# Altium PCB Controlador de velocidad.PcbDoc (part 1 of 2)
Units mil, origin at the board's own origin, x right, y up, seen from the top; angles counter-clockwise.
Board outline 3345 x 2660 mil, 2 copper layers (Top Layer, Bottom Layer); 54 components, 93 nets, 258 pads, 44 vias.
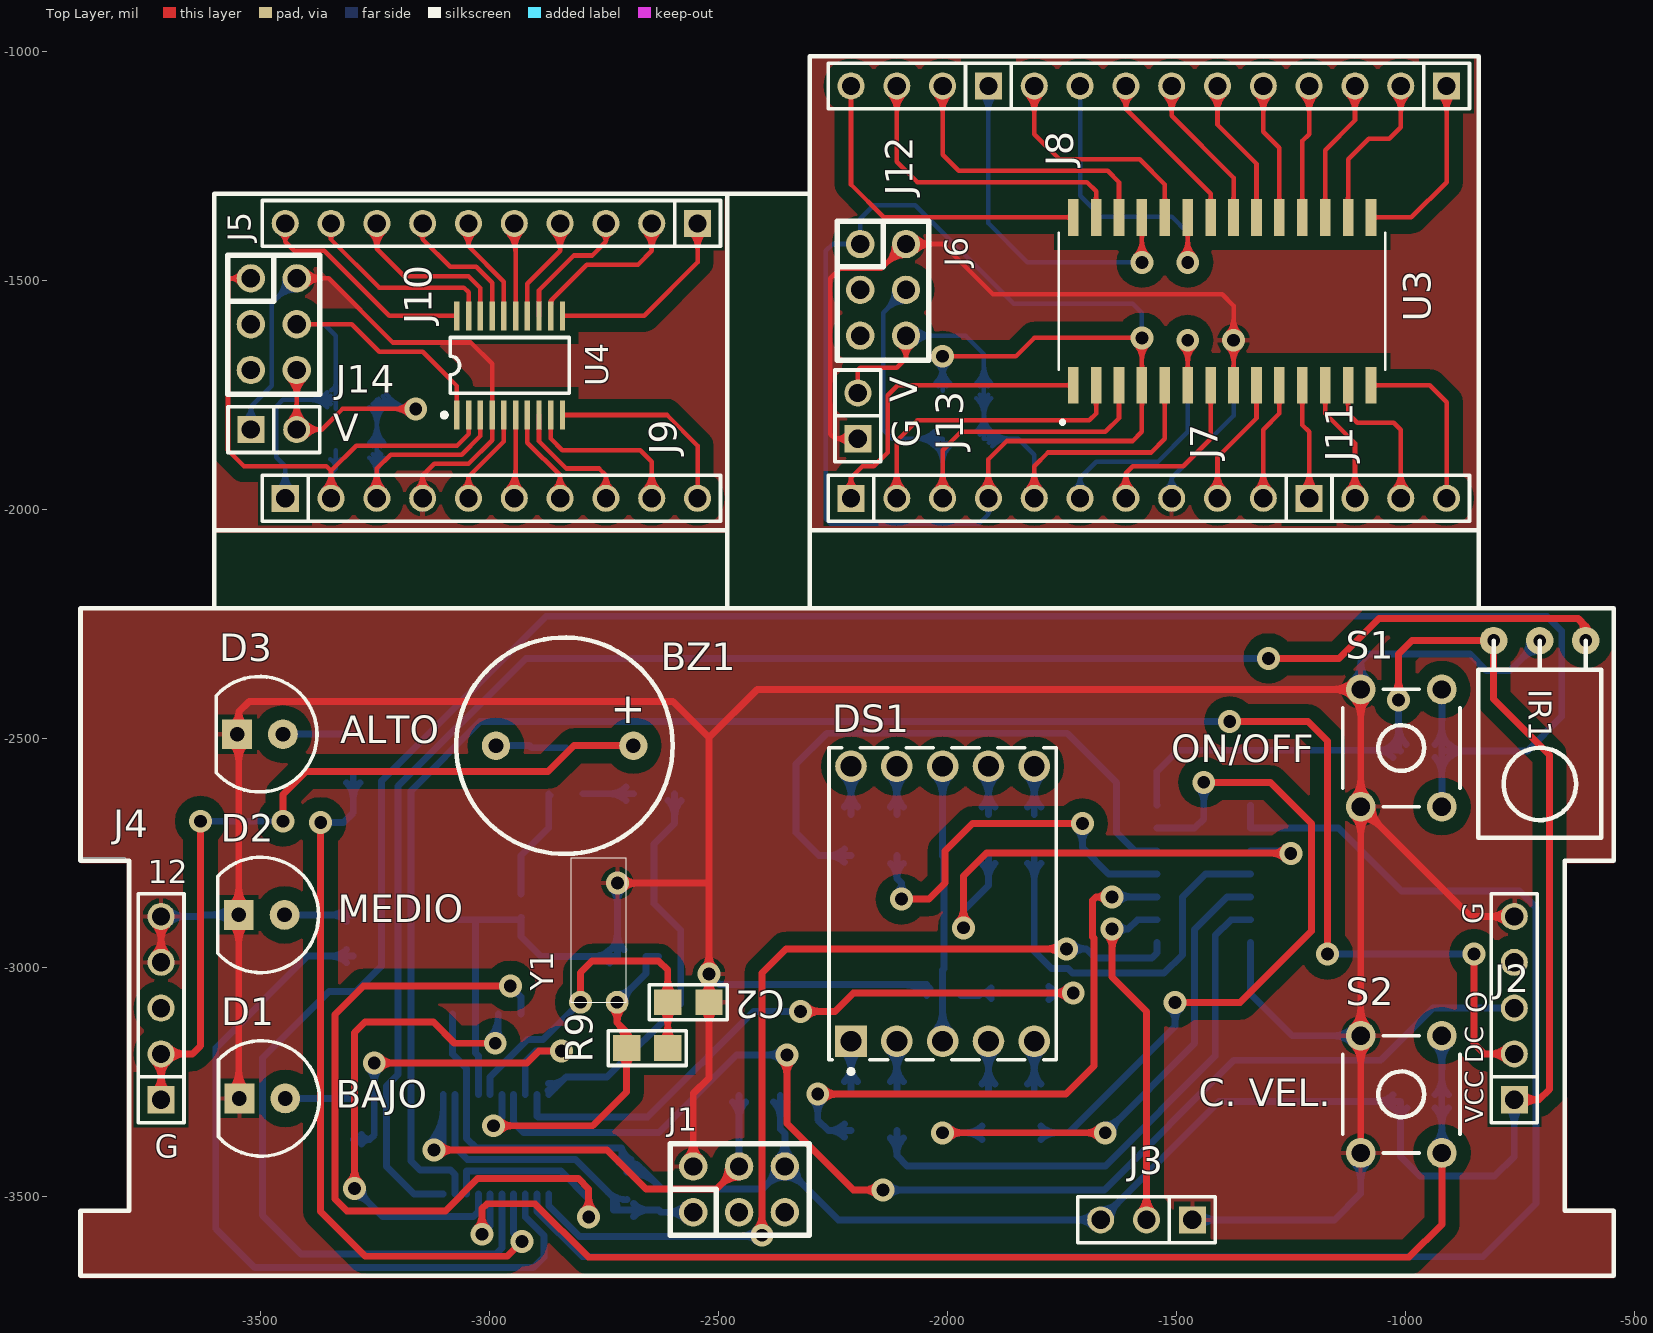
[diagram p0: Top Layer view]
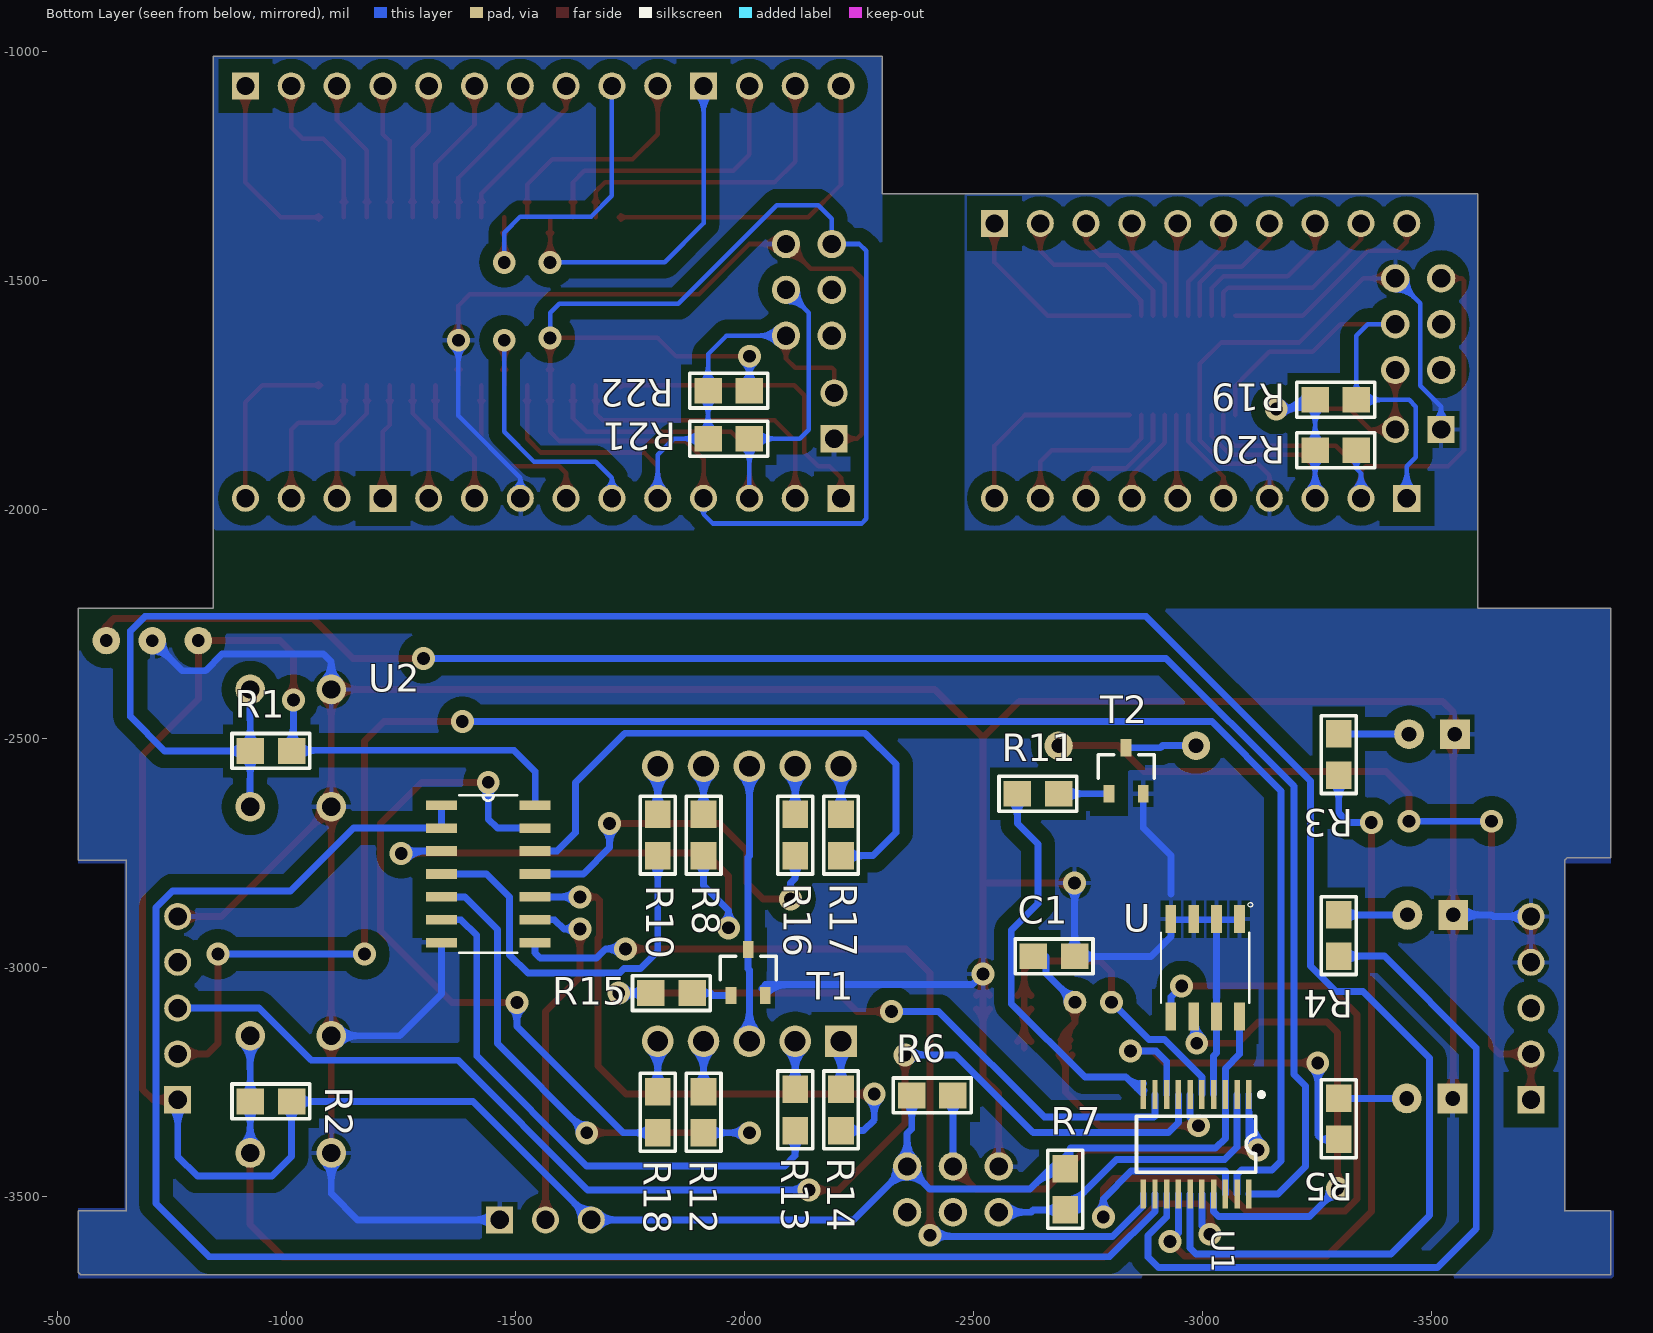
[diagram p1: Bottom Layer view, seen from below]

## Layer stack, top to bottom
Top Solder: solder mask 0.4, Solder Resist, Dk 3.5
Top Layer: signal copper 1.4
Dielectric1: dielectric 12.6, FR-4, Dk 4.8
Bottom Layer: signal copper 1.4
Bottom Solder: solder mask 0.4, Solder Resist, Dk 3.5

## Board outline
-3890,-2215 -3600,-2215 -3600,-1310 -2300,-1310 -2300,-1010 -840,-1010 -840,-2215 -545,-2215 -545,-2765 -650,-2765 -650,-3530 -545,-3530 -545,-3665 -550,-3670 -3890,-3670 -3890,-3530 -3790,-3530 -3790,-2765 -3795,-2760 -3890,-2760 -3890,-2215

## Design rules (kind name [scope] priority, off if disabled: settings)
Clearance GND [InPolygon] p1: gap=30
Clearance Clearance_1 [All] p2: gap=10
FabricationTestpoint [(IsPad And (OnTopLayer Or OnBottomLayer))] p1: side=3 testpointundercomponent=TRUE minsize=40 maxsize=100 preferedsize=60 minholesize=0 maxholesize=40 preferedholesize=32 testpointgrid=1 allowsidetop=TRUE allowsidebottom=TRUE usegrid=TRUE gridtolerance=0.01
PolygonConnect [All] p1: connectstyle=Relief reliefconductorwidth=10 reliefentries=4 polygonreliefangle="90 Angle" airgapwidth=10
RoutingVias [All] p1: holewidth=28 width=50 viastyle="Through Hole" minholewidth=28 minwidth=50 maxholewidth=28 maxwidth=50
SolderMaskExpansion [All] p1: expansion=4
Width Placas_prueba [InNet('A4-2', 'A4-3', 'A5-2', 'A5-3', 'VCC-2', 'GND-2', 'VCC-3', 'GND-3', 'SH4-1', 'SH4-2', 'SH4-3', 'SH4-4', 'SH4-5', 'SH4-6', 'SH4-7', 'SH4-8', 'SH4-9', 'SH4-10', 'SH4-11', 'SH4-12', 'SH4-13', 'SH4-14', 'SH4-15', 'SH4-16', 'SH4-17', 'SH4-18', 'SH4-19', 'SH4-20', 'SH16-1', 'SH16-2', 'SH16-3', 'SH16-4', 'SH16-5', 'SH16-6', 'SH16-7', 'SH16-8', 'SH16-9', 'SH16-10', 'SH16-11', 'SH16-12', 'SH16-13', 'SH16-14', 'SH16-15', 'SH16-16', 'SH16-17', 'SH16-18', 'SH16-19', 'SH16-20', 'SH16-21', 'SH16-22', 'SH16-23', 'SH16-24', 'SH16-25', 'SH16-26', 'SH16-27', 'SH16-28')] p1: maxlimit=10 minlimit=10 preferedwidth=10
Width [All] p2: maxlimit=20 minlimit=15 preferedwidth=15 bottomlayer_maxwidth=15 minimp=50.000000 maximp=50.000000 favimp=50.000000
29 further rules are at their usual default settings.

## Components (designator, comment, footprint, x,y, rotation, side; value= is the part's Value field where it differs from the comment)
BZ1 "BUZZER CON OSCILADOR" "BUZZER 12MM" -2835,-2515 r180 top
C1 "22p" 0805 -2675,-2975 r180 bottom
C2 "22p" 0805 -2565,-3075 r0 top
D1 "ROJO" LED5 -3495,-3285 r180 top
D2 "AMARILLO" LED5 -3496.52,-2884.37 r180 top
D3 "VERDE" LED5 -3500,-2490 r180 top
DS1 "HDSP-5503" H-10 -2010,-2860 r0 top
IR1 "IRM8601S" IRM8601S -572.99,-2348.9 r180 top
J1 "BDM Port" JBDM -2554.37,-3533.48 r0 top
J2 "CON5" SIP5 -762.17,-3287.82 r90 top
J3 "JUMPER" JUMPER3 -1565,-3550 r180 top
J4 "CON5" SIP5 -3716,-3287.82 r90 top
J5 "BDM Port" JBDM -3520,-1495 r270 top (schematic designator J1)
J6 "BDM Port" JBDM -2190,-1420 r270 top (schematic designator J1)
J7 "CON10" SIP10 -2210,-1975 r0 top
J8 "CON10" SIP10 -910,-1075 r180 top
J9 "CON10" SIP10 -3445,-1975 r0 top
J10 "CON10" SIP10 -2545,-1375 r180 top
J11 "CON4" SIP4 -1060,-1975 r0 top
J12 "CON4" SIP4 -2060,-1075 r180 top
J13 "CON2" SIP2 -2195,-1795 r90 top
J14 "CON2" SIP2 -3470,-1825 r0 top
R1 "10k" 0805 -965.63,-2526.52 r180 bottom
R2 "10k" 0805 -965.63,-3291.52 r180 bottom
R3 "330" 0805 -3296.52,-2534.37 r270 bottom
R4 "330" 0805 -3296.52,-2929.37 r270 bottom
R5 "330" 0805 -3296.52,-3329.37 r270 bottom
R6 "4K7" 0805 -2409.37,-3278.48 r180 bottom
R7 "4K7" 0805 -2699.37,-3483.48 r270 bottom
R8 "330" 0805 -1910,-2710 r90 bottom
R9 "3M" 0805 -2655,-3175 r180 top (schematic designator R5)
R10 "330" 0805 -1810,-2710 r90 bottom
R11 "10K" 0805 -2640,-2620 r180 bottom
R12 "330" 0805 -1910,-3315 r90 bottom
R13 "330" 0805 -2110,-3310 r90 bottom
R14 "330" 0805 -2210,-3310 r90 bottom
R15 "10k" 0805 -1840,-3055 r180 bottom
R16 "330" 0805 -2110,-2710 r90 bottom
R17 "330" 0805 -2210,-2710 r90 bottom
R18 "330" 0805 -1810,-3315 r90 bottom
R19 "4K7" 0805 -3290,-1760 r180 bottom
R20 "4K7" 0805 -3290,-1870 r180 bottom
R21 "4K7" 0805 -1965,-1845 r180 bottom
R22 "4K7" 0805 -1965,-1740 r180 bottom
S1 "ON/OFF" TACTSWITCH -1008.9,-2520.15 r0 top
S2 "CV" TACTSWITCH -1008.9,-3276.05 r0 top
T1 "TRANSISTOR NPN" SOT23 -1970,-3060 r180 bottom
T2 "TRANSISTOR NPN" SOT23 -2795,-2620 r180 bottom
U "AT24C256C-SSHL-T" SOIC127P600X175-8N -3005,-3000 r270 bottom
U1 "MC9S08SH4 (TSSOP20)" TSSOP20 -2985,-3385 r0 bottom
U2 "74HC164D,653" SOIC127P600X175-14N -1440,-2795 r180 bottom (schematic designator U1)
U3 "SH16" *SOIC127P1032X265-28N -1400,-1545 r90 top (schematic designator U1)
U4 "MC9S08SH4 (TSSOP20)" TSSOP20 -2955,-1685 r0 top
Y1 "32.768 KHz" X32768 -2720,-3075 r180 top

## Footprints (in the part's own frame and the unit in brackets; to place one, negate y for a bottom-side part, rotate by r counter-clockwise, add the part's x,y. Pads: shape width x height; smd on the part's side, far side on the other; paste and mask are expansions set on the pad)
0805 [mil] "Pasivo 0805"
  rect 60x56 smd: 1(-45,0) 2(45,0)
  silkscreen extent -85,-38 85,38, body extent -40,-25 39,25, height 15
*SOIC127P1032X265-28N [mm]
  rect 2.05x0.59 smd: 1(-4.655,8.255) 2(-4.655,6.985) 3(-4.655,5.715) 4(-4.655,4.445) 5(-4.655,3.175) 6(-4.655,1.905) 7(-4.655,0.635) 8(-4.655,-0.635) 9(-4.655,-1.905) 10(-4.655,-3.175) 11(-4.655,-4.445) 12(-4.655,-5.715) 13(-4.655,-6.985) 14(-4.655,-8.255) 15(4.655,-8.255) 16(4.655,-6.985) 17(4.655,-5.715) 18(4.655,-4.445) 19(4.655,-3.175) 20(4.655,-1.905) 21(4.655,-0.635) 22(4.655,0.635) 23(4.655,1.905) 24(4.655,3.175) 25(4.655,4.445) 26(4.655,5.715) 27(4.655,6.985) 28(4.655,8.255)
  silkscreen extent -6.8,-9.05 3.8,9.05
"BUZZER 12MM" [mil]
  round 62 hole 32: 1(-150,0) 2(150,0)
  silkscreen extent -236,-236 236,236, body extent -368,-236 240,236, height 380
H-10 [mil] "LED, 7-Segment Display, 14.22 mm, RHD; 10 Leads; Row Space 15.24 mm; Pitch 2.54 mm"
  rect 69x69 hole 45.5: 1(-200,-300)
  round 69 hole 45.5: 2(-100,-300) 3(0,-300) 4(100,-300) 5(200,-300) 6(200,300) 7(100,300) 8(0,300) 9(-100,300) 10(-200,300)
  silkscreen extent -248,-371 248,341
IRM8601S [mm]
  round 1.524 hole 0.7: 1(0.85,-1.61) 2(3.4,-1.6) 3(5.95,-1.61)
  silkscreen extent -0.01,-1.61 6.8,9.33
JBDM [mil]
  round 62 hole 40: 1(0,0) 2(0,100) 3(100,0) 4(100,100) 5(200,0) 6(200,100)
  silkscreen extent -50,-50 253,150
JUMPER3 [mm]
  rect 1.5x1.5 hole 1.016: 1(-2.54,0)
  round 1.5 hole 1.016: 2(0,0) 3(2.54,0)
  silkscreen extent -3.81,-1.27 3.81,1.27, body extent -3.81,-1.3 3.81,1.27, height 16.15
LED5 [mil]
  round 65 hole 32: 1(-50,0)
  rect 65x65 hole 32: 2(50,0)
  silkscreen extent -124,-126 96,126, body extent -117,-117 97,120, height 485
SIP2 [mm]
  rect 1.5x1.5 hole 1.016: 1(-1.27,0)
  round 1.5 hole 1.016: 2(1.27,0)
  silkscreen extent -2.54,-1.27 2.54,1.27
SIP4 [mil]
  rect 59.06x59.06 hole 40: 1(-150,0)
  round 59.06 hole 40: 2(-50,0) 3(50,0) 4(150,0)
  silkscreen extent -200,-50 200,50, body extent -200,-50 200,50, height 330
SIP5 [mm]
  rect 1.5x1.5 hole 1.016: 1(0,0)
  round 1.5 hole 1.016: 2(2.54,0) 3(5.08,0) 4(7.62,0) 5(10.16,0)
  silkscreen extent -1.27,-1.27 11.43,1.27, body extent -1.27,-1.27 11.43,1.27, height 8.38
SIP10 [mm]
  rect 1.5x1.5 hole 1.016: 1(0,0)
  round 1.5 hole 1.016: 2(2.54,0) 3(5.08,0) 4(7.62,0) 5(10.16,0) 6(12.7,0) 7(15.24,0) 8(17.78,0) 9(20.32,0) 10(22.86,0)
  silkscreen extent -1.27,-1.27 24.13,1.27, body extent -1.27,-1.3 24.13,1.27, height 8.38
SOIC127P600X175-8N [mm]
  rect 1.55x0.6 smd: 1(-2.7,1.905) 2(-2.7,0.635) 3(-2.7,-0.635) 4(-2.7,-1.905) 5(2.7,-1.905) 6(2.7,-0.635) 7(2.7,0.635) 8(2.7,1.905)
  silkscreen extent -3.63,-2.45 1.95,2.63
SOIC127P600X175-14N [mil]
  rect 67x21 smd: 1(-102,150) 2(-102,100) 3(-102,50) 4(-102,0) 5(-102,-50) 6(-102,-100) 7(-102,-150) 8(102,-150) 9(102,-100) 10(102,-50) 11(102,0) 12(102,50) 13(102,100) 14(102,150)
  silkscreen extent -63,-172 63,172
SOT23 [mm]
  rect 0.6x0.95 smd: 1(0,0) 2(0.95,2.55) 3(1.9,0)
  silkscreen extent -0.6,0.87 2.5,2.18, body extent -0.53,-0.25 2.47,2.88, height 1
TACTSWITCH [mil]
  round 65 hole 40: 1(-88.58,-127.95) 1(-88.58,127.95) 2(88.58,-127.95) 2(88.58,127.95)
  silkscreen extent -128,-128 128,128, body extent -120,-156 124,156, height 276
TSSOP20 [mm]
  rect 0.3x1.6 smd: 1(-2.925,-2.75) 2(-2.275,-2.75) 3(-1.625,-2.75) 4(-0.975,-2.75) 5(-0.325,-2.75) 6(0.325,-2.75) 7(0.975,-2.75) 8(1.625,-2.75) 9(2.275,-2.75) 10(2.925,-2.75) 11(2.925,2.75) 12(2.275,2.75) 13(1.625,2.75) 14(0.975,2.75) 15(0.325,2.75) 16(-0.325,2.75) 17(-0.975,2.75) 18(-1.625,2.75) 19(-2.275,2.75) 20(-2.925,2.75)
  silkscreen extent -3.75,-2.87 3.3,1.55
X32768 [mil]
  round 50 hole 28: 1(80.5,0) 2(0.5,0)
  silkscreen extent -19,-315 101,0

## Part data
BZ1: library part BUZZER
C1 C2: library part CAP
D1 D2 D3: library part LED
DS1: "14.22 mm Gray Surface HER 7-Segment Display: CC, RH DP"
IR1: "Sensor IR"
J1 J5 J6: library part JBDM
J3: library part JUMPER3
R1 R2 R3 R4 R5 R6 R7 R8 R9 R10 R11 R12 R13 R14 R15 R16 R17 R18 R19 R20 R21 R22: library part RES
S1 S2: library part "TACT SWITCH"
U: "EEPROM Memory IC 256Kb _32K x 8_ I²C 1MHz 550ns 8-SOIC"
U1 U4: library part MC9S08SH8_20
U2: "Shift Shift Register 1 Element 8 Bit 14-SO"
U3: library part MAX3243EWIT, "3/5 Transceiver Full RS232 28-SOIC"
Y1: library part CRYSTAL

## Via types
v1: diameter 50, hole 28, Top Layer to Bottom Layer, 44 vias

## Nets (pads, with @x,y where several pads share a name; then routed paths per layer and width w, separated by ;. In a path a pad name is that pad's centre, name@x,y a point inside that pad or via, vN(x,y) a via of type N, cw(c..) or ccw(c..) an arc to the next point about the centre after c; other vN are vias at no path point)
12V: BZ1.1 J4.1 J4.2 | length 1983.7
  Top Layer w15: J4.1@-3731.58,-3272.25 ccw(c-3769.18,-3234.64) -3716,-3234.64 ccw(c-3662.82,-3234.64) J4.1@-3700.43,-3272.25 ; J4.2@-3731.58,-3203.4 cw(c-3769.18,-3241) -3716,-3241 cw(c-3662.82,-3241) -3700.43,-3203.4 cw(c-3662.82,-3241) -3662.82,-3187.82 cw(c-3662.82,-3134.64) J4.2@-3700.43,-3172.25 ; J4.1@-3716,-3287.82 J4.2@-3716,-3187.82 -3647.82,-3187.82 -3630,-3170 -3630,-2685 v1@-3625,-2680 ; v1(-3450,-2680) -3450,-2621.52 -3400,-2571.52 -2871.52,-2571.52 -2815,-2515 BZ1.1@-2685,-2515
  Bottom Layer w15: v1(-3630,-2680) v1(-3450,-2680)
A4: J1.1 R7.2 U1.2 | length 954.2
  Bottom Layer w15: U1.2@-3074.57,-3276.73 -3074.57,-3391.52 -3047.57,-3418.52 -2811.63,-3418.52 -2728.63,-3501.52 -2728.63,-3528.48 R7.2@-2699.36,-3528.48 -2629.63,-3528.48 -2624.63,-3533.48 J1.1@-2554.36,-3533.48 ; -2741.73,-3488.43 ccw(c-2699.36,-3446.07) R7.2@-2699.36,-3505.98 ; -2731.31,-3498.85 cw(c-2758.94,-3526.48) R7.2@-2719.86,-3526.48 ; R7.2@-2684.87,-3542.97 cw(c-2649.87,-3577.97) -2649.87,-3528.48 cw(c-2649.87,-3478.99) R7.2@-2684.87,-3513.98 ; J1.1@-2570.98,-3550.09 ccw(c-2611.1,-3590.21) -2611.1,-3533.48 ccw(c-2611.1,-3476.74) J1.1@-2570.98,-3516.86
A4-2: J5.1 J9.2 R20.2 U4.2 | length 1592.9
  Top Layer w10: J5.1@-3542.53,-1507.98 ccw(c-3565,-1520.94) -3565,-1495 ; J5.1@-3542.53,-1482.02 cw(c-3565,-1469.06) -3565,-1495 ; J5.1@-3520,-1495 -3565,-1495 ; J9.2@-3362.34,-1957.66 ccw(c-3404.22,-1915.78) -3345,-1915.78 ccw(c-3285.79,-1915.78) J9.2@-3327.66,-1957.66 ; J9.2@-3355.27,-1964.73 ccw(c-3380.07,-1939.93) -3345,-1939.93 ccw(c-3309.93,-1939.93) J9.2@-3334.73,-1964.73 ; J9.2@-3345,-1975 -3345,-1915 ; U4.2@-3044.57,-1793.27 -3044.57,-1834.57 -3070,-1860 -3290,-1860 -3345,-1915 ; -3565,-1495 -3570,-1500 -3570,-1870 -3535,-1905 -3355,-1905 -3345,-1915
  Bottom Layer w10: J9.2@-3361.39,-1956.75 ccw(c-3394.39,-1920) -3345,-1920 ; J9.2@-3354.71,-1964.19 ccw(c-3374.26,-1942.43) -3345,-1942.43 ccw(c-3315.74,-1942.43) J9.2@-3335.29,-1964.19 ; R20.2@-3346.57,-1889.88 cw(c-3358.28,-1910) -3335,-1910 cw(c-3311.72,-1910) R20.2@-3323.43,-1889.88 ; J9.2@-3345,-1975 -3345,-1920 ; R20.2@-3335,-1870 -3335,-1910 -3345,-1920 ; J9.2@-3328.61,-1956.75 cw(c-3295.61,-1920) -3345,-1920
A4-3: J6.1 J7.4 R22.2 U3.4 | length 3597.4
  Top Layer w10: v1(-2010,-1665) -1850,-1665 -1810,-1625 v1(-1575,-1625) U3.4@-1575,-1728.27 -1575,-1830 -1595,-1850 -1870,-1850 -1910,-1890 J7.4@-1910,-1975 ; J7.4@-1927.34,-1957.66 ccw(c-1969.22,-1915.78) -1910,-1915.78 ccw(c-1850.79,-1915.78) J7.4@-1892.66,-1957.66 ; J7.4@-1920.27,-1964.73 ccw(c-1945.07,-1939.93) -1910,-1939.93 ccw(c-1874.93,-1939.93) J7.4@-1899.73,-1964.73 ; v1@-1589.14,-1639.14 cw(c-1623.29,-1673.28) -1575,-1673.28 cw(c-1526.72,-1673.28) v1@-1560.86,-1639.14 ; U3.4@-1579.68,-1761.68 cw(c-1590.97,-1772.98) -1575,-1772.98 cw(c-1559.03,-1772.98) U3.4@-1570.32,-1761.68 ; U3.4@-1579.68,-1694.85 ccw(c-1590.97,-1683.56) -1575,-1683.56 ccw(c-1559.03,-1683.56) U3.4@-1570.32,-1694.85
  Bottom Layer w10: R22.2@-2026.26,-1723.74 ccw(c-2065.53,-1684.47) -2010,-1684.47 ccw(c-1954.47,-1684.47) R22.2@-1993.74,-1723.74 ; v1@-2024.14,-1679.14 cw(c-2058.29,-1713.28) -2010,-1713.28 cw(c-1961.72,-1713.28) v1@-1995.86,-1679.14 ; R22.2@-2019.19,-1730.81 ccw(c-2041.39,-1708.61) -2010,-1708.61 ccw(c-1978.62,-1708.61) R22.2@-2000.81,-1730.81 ; R22.2@-2010,-1740 v1(-2010,-1665) ; J7.4@-1918.37,-1998.05 cw(c-1922.71,-2010) -1910,-2010 ; J7.4@-1910,-1975 -1910,-2010 ; J7.4@-1901.63,-1998.05 ccw(c-1897.29,-2010) -1910,-2010 ; v1(-1575,-1625) -1575,-1570 -1595,-1550 -1855,-1550 -2070,-1335 -2160,-1335 -2190,-1365 J6.1@-2190,-1420 -2250,-1420 -2265,-1435 -2265,-2020 -2255,-2030 -1930,-2030 -1910,-2010
A5: J1.4 R6.2 U1.1 | length 1413.7
  Top Layer w15: v1(-3120.16,-3397.52) -2742.48,-3397.52 -2657.48,-3482.52 -2503.41,-3482.52 J1.4@-2454.36,-3433.48 ; v1@-3107.78,-3409.9 cw(c-3077.91,-3439.77) -3077.91,-3397.52 cw(c-3077.91,-3355.27) v1@-3107.78,-3385.15 ; J1.4@-2477.86,-3433.48 cw(c-2534.6,-3433.48) -2494.48,-3473.59 cw(c-2454.36,-3513.71) J1.4@-2454.36,-3456.98
  Bottom Layer w15: v1@-3132.53,-3385.15 ccw(c-3210.69,-3306.99) U1.1@-3100.16,-3306.99 ; v1@-3121.93,-3395.76 ccw(c-3174.48,-3343.2) -3100.16,-3343.2 ; v1(-3120.16,-3397.52) -3100.16,-3377.52 U1.1@-3100.16,-3276.73 ; v1@-3111.32,-3406.36 ccw(c-3138.27,-3379.42) -3100.16,-3379.42 ; R6.2@-2468.86,-3292.97 cw(c-2503.86,-3327.97) -2454.36,-3327.97 cw(c-2404.87,-3327.97) R6.2@-2439.87,-3292.97 ; J1.4@-2454.36,-3433.48 R6.2@-2454.36,-3278.48
A5-2: J5.4 J9.1 R19.2 U4.1 | length 1388.8
  Top Layer w10: J5.4@-3420,-1595 -3300,-1595 -3240,-1655 -3145,-1655 -3100,-1700 -3070.16,-1729.84 U4.1@-3070.16,-1793.27
  Bottom Layer w10: J9.1@-3462.34,-1957.66 ccw(c-3504.22,-1915.78) -3445,-1915.78 ccw(c-3385.79,-1915.78) J9.1@-3427.66,-1957.66 ; J9.1@-3455.27,-1964.73 ccw(c-3480.07,-1939.93) -3445,-1939.93 ccw(c-3409.93,-1939.93) J9.1@-3434.73,-1964.73 ; J9.1@-3445,-1975 -3445,-1905 -3465,-1885 -3465,-1775 -3450,-1760 R19.2@-3335,-1760 ; J5.4@-3420,-1595 -3360,-1595 -3335,-1620 -3335,-1725 ; R19.2@-3353.26,-1776.26 ccw(c-3392.53,-1815.53) -3392.53,-1760 ccw(c-3392.53,-1704.47) R19.2@-3353.26,-1743.74 ; R19.2@-3346.19,-1769.19 ccw(c-3368.39,-1791.38) -3368.39,-1760 ccw(c-3368.39,-1728.61) R19.2@-3346.19,-1750.81 ; R19.2@-3344.13,-1738.89 ccw(c-3350.13,-1725) -3335,-1725 ; R19.2@-3335,-1780 R19.2@-3335,-1760 ; R19.2@-3325.87,-1738.89 cw(c-3319.87,-1725) -3335,-1725 ; R19.2@-3335,-1760 -3335,-1725
A5-3: J6.4 J7.3 R21.2 U3.3 | length 1790.2
  Top Layer w10: J7.3@-2027.34,-1957.66 ccw(c-2069.22,-1915.78) -2010,-1915.78 ccw(c-1950.79,-1915.78) J7.3@-1992.66,-1957.66 ; J7.3@-2020.27,-1964.73 ccw(c-2045.07,-1939.93) -2010,-1939.93 ccw(c-1974.93,-1939.93) J7.3@-1999.73,-1964.73 ; J7.3@-2010,-1975 -2010,-1870 -1970,-1830 -1655,-1830 -1625,-1800 U3.3@-1625,-1728.27 ; U3.3@-1629.68,-1761.68 cw(c-1640.97,-1772.98) -1625,-1772.98 cw(c-1609.03,-1772.98) U3.3@-1620.32,-1761.68
  Bottom Layer w10: J6.4@-2116,-1520 cw(c-2178.77,-1520) -2134.39,-1564.38 cw(c-2090,-1608.77) J6.4@-2090,-1546 ; J6.4@-2106,-1520 cw(c-2144.63,-1520) -2117.31,-1547.31 cw(c-2090,-1574.63) J6.4@-2090,-1536 ; J6.4@-2090,-1520 -2140,-1570 -2140,-1825 -2120,-1845 R21.2@-2010,-1845 J7.3@-2010,-1975 ; R21.2@-2028.26,-1861.26 ccw(c-2067.53,-1900.53) -2067.53,-1845 ccw(c-2067.53,-1789.47) R21.2@-2028.26,-1828.74 ; R21.2@-2026.26,-1861.26 cw(c-2065.53,-1900.53) -2010,-1900.53 cw(c-1954.47,-1900.53) R21.2@-1993.74,-1861.26 ; R21.2@-2021.19,-1854.19 ccw(c-2043.39,-1876.38) -2043.39,-1845 ccw(c-2043.39,-1813.61) R21.2@-2021.19,-1835.81 ; R21.2@-2019.19,-1854.19 cw(c-2041.39,-1876.38) -2010,-1876.38 cw(c-1978.62,-1876.38) R21.2@-2000.81,-1854.19
B6: C1.1 R9.2 U1.6 Y1.2 | length 1176.6
  Top Layer w15: v1(-2990.63,-3344.52) -2773.63,-3344.52 -2700,-3270.89 R9.2@-2700,-3175 -2700,-3140 ; v1@-2978.26,-3356.9 cw(c-2948.39,-3386.77) -2948.39,-3344.52 cw(c-2948.39,-3302.27) v1@-2978.26,-3332.15 ; Y1.2@-2732.88,-3087.37 cw(c-2762.75,-3117.25) -2720.5,-3117.25 cw(c-2678.25,-3117.25) Y1.2@-2708.13,-3087.37 ; -2721.16,-3118.84 cw(c-2760.13,-3157.82) R9.2@-2707.28,-3173.44 ; Y1.2@-2720.5,-3075 -2720.5,-3119.5 -2700,-3140 ; R9.2@-2714.5,-3189.49 cw(c-2749.49,-3224.49) -2700,-3224.49 cw(c-2650.51,-3224.49) R9.2@-2685.51,-3189.49 ; R9.2@-2710.03,-3157.12 ccw(c-2719.63,-3140) -2700,-3140 ; -2703.32,-3136.68 cw(c-2732.59,-3165.96) R9.2@-2692.89,-3177.69 ; R9.2@-2689.97,-3157.12 cw(c-2680.37,-3140) -2700,-3140
  Bottom Layer w15: v1(-2990.63,-3344.52) -2972.2,-3326.09 U1.6@-2972.2,-3276.73 ; Y1.2@-2720.5,-3075 -2657.63,-3012.13 -2657.63,-2975 C1.1@-2630,-2975 ; Y1.2@-2720.5,-3057.5 ccw(c-2720.5,-3015.25) -2690.63,-3045.12 ccw(c-2660.75,-3075) Y1.2@-2703,-3075
B7: C2.1 R9.1 U1.5 Y1.1 | length 980.3
  Top Layer w15: Y1.1@-2800.5,-3075 -2800.5,-3010.5 -2775,-2985 -2630,-2985 -2610,-3005 C2.1@-2610,-3075 R9.1@-2610,-3175 ; R9.1@-2624.5,-3160.5 ccw(c-2659.49,-3125.51) -2610,-3125.51 ccw(c-2560.51,-3125.51) R9.1@-2595.51,-3160.5 ; C2.1@-2624.5,-3089.49 cw(c-2659.49,-3124.49) -2610,-3124.49 cw(c-2560.51,-3124.49) C2.1@-2595.51,-3089.49 ; C2.1@-2624.5,-3060.5 ccw(c-2659.49,-3025.51) -2610,-3025.51 ccw(c-2560.51,-3025.51) C2.1@-2595.51,-3060.5
  Bottom Layer w15: U1.5@-2997.8,-3276.73 -2997.8,-3238.52 -2915.8,-3156.52 -2882.02,-3156.52 Y1.1@-2800.5,-3075
BUZZER: R11.1 U1.10 | length 1009
  Bottom Layer w15: U1.10@-2871.09,-3267.69 ccw(c-2869.52,-3246.84) -2854.74,-3261.62 ; U1.10@-2869.96,-3252.73 ccw(c-2866.27,-3203.89) -2831.64,-3238.52 ; U1.10@-2869.84,-3276.73 -2831.63,-3238.52 ; R11.1@-2609.5,-2634.49 cw(c-2644.49,-2669.49) -2595,-2669.49 cw(c-2545.51,-2669.49) R11.1@-2580.51,-2634.49 ; R11.1@-2595,-2620 -2595,-2685 -2640,-2730 -2640,-2860 -2581.63,-2918.37 -2581.63,-3077.52 -2742.63,-3238.52 -2831.63,-3238.52
CLOCK: U1.11 U2.8 | length 2276.6
  Top Layer w15: v1@-2417.01,-3571.15 ccw(c-2446.88,-3541.27) -2404.63,-3541.27 ccw(c-2362.39,-3541.27) v1@-2392.26,-3571.15 ; v1(-2404.63,-3583.52) -2404.63,-3011.52 -2351.63,-2958.52 v1(-1739.63,-2958.52) ; v1@-1752.01,-2970.9 ccw(c-1781.88,-3000.77) -1781.88,-2958.52 ccw(c-1781.88,-2916.27) v1@-1752.01,-2946.15
  Bottom Layer w15: U1.11@-2869.84,-3493.27 -2869.84,-3518.52 -2802.34,-3586.02 -2407.13,-3586.02 v1(-2404.63,-3583.52) ; -2452.92,-3586.02 ccw(c-2452.92,-3535.24) v1@-2417.01,-3571.15 ; -2440.85,-3586.02 cw(c-2440.85,-3619.74) v1@-2417.01,-3595.9 ; v1(-1739.63,-2958.52) -1696.48,-2958.52 -1676.48,-2978.52 -1553.52,-2978.52 -1542,-2967 U2.8@-1542,-2945 ; v1@-1727.26,-2970.9 cw(c-1697.39,-3000.77) -1697.39,-2958.52 cw(c-1697.39,-2916.27) v1@-1727.26,-2946.15
CV: R2.1 S2.2 U1.16 | length 3141.2
  Top Layer w15: v1@-3028.01,-3569.15 ccw(c-3057.88,-3539.27) -3015.63,-3539.27 ccw(c-2973.39,-3539.27) v1@-3003.26,-3569.15 ; v1(-3015.63,-3581.52) -3015.63,-3525.63 -3005,-3515 -2900,-3515 -2783.48,-3631.52 -991.52,-3631.52 -920.32,-3560.32 S2.2@-920.32,-3404
  Bottom Layer w15: v1(-3015.63,-3581.52) -2997.8,-3563.69 U1.16@-2997.8,-3493.27 ; S2.2@-938,-3165.77 cw(c-980.67,-3208.45) -920.32,-3208.45 cw(c-859.96,-3208.45) S2.2@-902.64,-3165.77 ; S2.2@-936.88,-3385.27 ccw(c-969.37,-3348.53) -920.32,-3348.53 ; R2.1@-935.13,-3306.02 cw(c-970.13,-3341.01) -920.63,-3341.01 cw(c-871.14,-3341.01) R2.1@-906.14,-3306.02 ; R2.1@-935.13,-3277.03 ccw(c-970.13,-3242.03) -920.63,-3242.03 ccw(c-871.14,-3242.03) R2.1@-906.14,-3277.03 ; S2.2@-920.32,-3404 -920.32,-3348.52 ; S2.2@-920.32,-3148.1 -920.32,-3220.21 -920.63,-3220.52 R2.1@-920.63,-3291.52 -920.63,-3348.21 -920.32,-3348.52 ; S2.2@-903.76,-3385.27 cw(c-871.26,-3348.53) -920.32,-3348.53
DATA: U1.12 U2.1 U2.2 | length 3699.4
  Bottom Layer w15: U1.12@-2895.43,-3493.27 -2895.43,-3531.52 -2796.43,-3630.52 -830.52,-3630.52 -714.63,-3514.63 -714.63,-2868.52 -750.63,-2832.52 -1008.11,-2832.52 -1145.63,-2695 U2.2@-1338,-2695 U2.1@-1338,-2645
DC0: J2.2 U1.19 | length 4199.8
  Top Layer w15: v1(-1383.48,-2462.52) -1212.48,-2462.52 -1170,-2505 v1(-1170,-2970) ; v1(-850,-2970) -850,-3165 -827.18,-3187.82 J2.2@-762.17,-3187.82 ; J2.2@-777.75,-3203.4 ccw(c-815.35,-3241) -815.35,-3187.82 ccw(c-815.35,-3134.64) J2.2@-777.75,-3172.25
  Bottom Layer w15: U1.19@-3074.57,-3493.27 -3074.57,-3451.52 -3084.57,-3441.52 -3150.63,-3441.52 -3170.63,-3421.52 -3170.63,-2613.52 -3019.63,-2462.52 v1(-1383.48,-2462.52) ; v1(-1170,-2970) v1(-850,-2970)
GND: C1.2 C2.2 D1.2 D2.2 D3.2 IR1.2 J1.2 J2.5 J3.1 J4.4 J4.5 S1.1 S2.1 T1.3 T2.3 U1.4 U2.7 U.1 U.2 U.3 U.4 U.7 | length 12060.2
  Top Layer w15: J4.4@-3731.58,-2972.25 ccw(c-3769.18,-2934.64) -3716,-2934.64 ccw(c-3662.82,-2934.64) J4.4@-3700.43,-2972.25 ; J4.5@-3731.58,-2903.4 cw(c-3769.18,-2941) -3716,-2941 cw(c-3662.82,-2941) J4.5@-3700.43,-2903.4 ; J4.4@-3716,-2987.82 J4.5@-3716,-2887.82 ; D1.2@-3564.2,-3266.69 ccw(c-3606.88,-3224.01) -3546.52,-3224.01 ccw(c-3486.17,-3224.01) D1.2@-3528.85,-3266.69 ; D2.2@-3564.2,-2902.04 cw(c-3606.88,-2944.72) -3546.52,-2944.72 cw(c-3486.17,-2944.72) D2.2@-3528.85,-2902.04 ; D2.2@-3564.2,-2866.69 ccw(c-3606.88,-2824.01) -3546.52,-2824.01 ccw(c-3486.17,-2824.01) D2.2@-3528.85,-2866.69 ; D3.2@-3564.2,-2507.04 cw(c-3606.88,-2549.72) -3546.52,-2549.72 cw(c-3486.17,-2549.72) D3.2@-3528.85,-2507.04 ; D3.2@-3560.8,-2468.84 ccw(c-3579.8,-2441.52) -3546.52,-2441.52 ; D1.2@-3546.52,-3284.37 D2.2@-3546.52,-2884.37 -3546.52,-2441.52 ; D3.2@-3532.25,-2468.84 cw(c-3513.25,-2441.52) -3546.52,-2441.52 ; v1(-2720,-2815) -2520,-2815 ; v1@-2707.63,-2827.37 cw(c-2677.75,-2857.25) -2677.75,-2815 cw(c-2677.75,-2772.75) v1@-2707.63,-2802.63 ; J1.2@-2570.98,-3416.86 ccw(c-2611.1,-3376.74) -2554.36,-3376.74 ccw(c-2497.63,-3376.74) J1.2@-2537.75,-3416.86 ; J1.2@-2554.36,-3433.48 -2554.36,-3274.36 -2520,-3240 C2.2@-2520,-3075 v1(-2520,-3013.36) -2520,-2497.52 ; C2.2@-2534.5,-3089.49 cw(c-2569.49,-3124.49) -2520,-3124.49 cw(c-2470.51,-3124.49) C2.2@-2505.51,-3089.49 ; C2.2@-2534.5,-3060.5 ccw(c-2569.49,-3025.51) -2520,-3025.51 ccw(c-2470.51,-3025.51) C2.2@-2505.51,-3060.5 ; v1@-2532.38,-3025.73 cw(c-2562.25,-3055.6) -2520,-3055.6 cw(c-2477.75,-3055.6) v1@-2507.63,-3025.73 ; v1@-2532.38,-3000.98 ccw(c-2562.25,-2971.11) -2520,-2971.11 ccw(c-2477.75,-2971.11) v1@-2507.63,-3000.98 ; S2.1@-1115.16,-3165.77 cw(c-1157.84,-3208.45) -1097.48,-3208.45 cw(c-1037.13,-3208.45) S2.1@-1079.81,-3165.77 ; S2.1@-1115.16,-3130.42 ccw(c-1157.84,-3087.74) -1097.48,-3087.74 ccw(c-1037.13,-3087.74) S2.1@-1079.81,-3130.42 ; S1.1@-1115.16,-2665.77 cw(c-1157.84,-2708.45) -1097.48,-2708.45 cw(c-1037.13,-2708.45) S1.1@-1079.81,-2665.77 ; S1.1@-1115.16,-2630.42 ccw(c-1157.84,-2587.74) -1097.48,-2587.74 ccw(c-1037.13,-2587.74) S1.1@-1079.81,-2630.42 ; S1.1@-1115.16,-2374.52 cw(c-1157.84,-2331.84) -1157.84,-2392.19 cw(c-1157.84,-2452.55) -1115.16,-2409.87 cw(c-1157.84,-2452.55) -1097.48,-2452.55 cw(c-1037.13,-2452.55) S1.1@-1079.81,-2409.87 ; S2.1@-1097.48,-3404 S2.1@-1097.48,-3148.1 S1.1@-1097.48,-2648.1 ; S1.1@-1097.48,-2673.1 cw(c-1097.48,-2733.45) -1054.81,-2690.77 cw(c-1012.13,-2648.1) S1.1@-1072.48,-2648.1 ; J2.5@-777.75,-2903.4 ccw(c-815.35,-2941) -815.35,-2887.82 ccw(c-815.35,-2834.64) J2.5@-777.75,-2872.25 ; J2.5@-762.17,-2887.82 -857.76,-2887.82 S1.1@-1097.48,-2648.1 ; -3546.52,-2441.52 -3523.52,-2418.52 -2599,-2418.52 -2520,-2497.52 ; -2520,-2497.52 -2414.67,-2392.19 S1.1@-1097.48,-2392.19 S1.1@-1097.48,-2648.1
  Bottom Layer w15: J4.5@-3716,-2887.82 -3633.63,-2887.82 -3630.18,-2884.37 D2.2@-3546.52,-2884.37 ; J4.5@-3700.43,-2903.4 cw(c-3662.82,-2941) -3662.82,-2887.82 cw(c-3662.82,-2834.64) J4.5@-3700.43,-2872.25 ; D2.2@-3564.2,-2902.04 ccw(c-3606.88,-2944.72) -3606.88,-2884.37 ccw(c-3606.88,-2824.01) D2.2@-3564.2,-2866.69 ; U.1@-3080,-2895 U.2@-3030,-2895 ; U1.4@-3023.39,-3276.73 -3023.39,-3192.52 -3030,-3185.91 U.2@-3030,-2895 ; -2930,-2839 -2930,-2755 -2869.8,-2694.8 T2.3@-2869.8,-2620 ; T2.3@-2869.8,-2626.52 T2.3@-2866.54,-2623.26 ; C1.2@-2736.5,-2989.49 ccw(c-2771.49,-3024.49) -2771.49,-2975 ccw(c-2771.49,-2925.51) C1.2@-2736.5,-2960.5 ; C1.2@-2734.5,-2960.5 ccw(c-2769.49,-2925.51) -2720,-2925.51 ccw(c-2670.51,-2925.51) C1.2@-2705.51,-2960.5 ; v1@-2732.37,-2827.37 cw(c-2762.25,-2857.25) -2720,-2857.25 ; -2720,-2857.25 cw(c-2677.75,-2857.25) v1@-2707.63,-2827.37 ; v1@-2720,-2825 C1.2@-2720,-2975 -2886.52,-2975 -2930,-2931.52 -2930,-2890 -2929,-2890 -2934,-2895 U.2@-3030,-2895 ; v1(-2520,-3013.36) -2496.83,-3036.52 -2044.8,-3036.52 T1.3@-2044.8,-3060 ; -2095.25,-3036.52 cw(c-2095.25,-3103.56) T1.3@-2047.85,-3056.16 ; -2059.04,-3036.52 cw(c-2059.04,-3067.35) T1.3@-2037.24,-3045.55 ; J3.1@-1465,-3550 -1155,-3550 -1097.48,-3492.48 S2.1@-1097.48,-3404 ; J3.1@-1449.43,-3565.58 cw(c-1411.82,-3603.18) -1411.82,-3550 cw(c-1411.82,-3496.82) J3.1@-1449.43,-3534.42 ; U2.7@-1338,-2945 -1338,-3057 -1246.9,-3148.1 S2.1@-1097.48,-3148.1 ; S2.1@-1115.16,-3421.68 cw(c-1157.84,-3464.36) -1097.48,-3464.36 cw(c-1037.13,-3464.36) S2.1@-1079.81,-3421.68 ; S2.1@-1115.16,-3165.77 ccw(c-1157.84,-3208.45) -1157.84,-3148.1 ccw(c-1157.84,-3087.74) S2.1@-1115.16,-3130.42 ; S1.1@-1115.03,-2374.38 ccw(c-1156.28,-2332.49) -1097.48,-2332.49 ; S1.1@-1097.48,-2392.19 -1097.48,-2332.48 ; S1.1@-1079.94,-2374.38 cw(c-1038.69,-2332.49) -1097.48,-2332.49 ; IR1.2@-729.34,-2285.91 cw(c-783.66,-2285.91) -745.25,-2324.32 cw(c-706.84,-2362.73) IR1.2@-706.84,-2308.41 ; IR1.2@-706.84,-2285.91 -772.46,-2351.52 -822.46,-2351.52 -858.99,-2315 -1080,-2315 -1097.48,-2332.48
NetBZ1_2: BZ1.2 T2.2 | length 154.5
  Bottom Layer w15: BZ1.2@-2985,-2515 -2911.63,-2515 -2907.03,-2519.61 T2.2@-2832.4,-2519.61
NetD1_1: D1.1 R5.1 | length 140
  Bottom Layer w15: D1.1@-3445,-3285 R5.1@-3305,-3285
NetD2_1: D2.1 R4.1 | length 227.7
  Bottom Layer w15: D2.1@-3446.52,-2884.37 R4.1@-3296.52,-2884.37 ; R4.1@-3311.02,-2898.86 ccw(c-3346.01,-2933.86) -3346.01,-2884.37 ccw(c-3346.01,-2834.87) R4.1@-3311.02,-2869.87
NetD3_1: D3.1 R3.1 | length 149.1
  Bottom Layer w15: D3.1@-3445.63,-2489.37 R3.1@-3296.52,-2489.37
NetDS1_1: DS1.1 R14.2 | length 285.1
  Bottom Layer w15: DS1.1@-2229.09,-3179.09 cw(c-2275.18,-3225.18) -2210,-3225.18 cw(c-2144.82,-3225.18) DS1.1@-2190.91,-3179.09 ; R14.2@-2224.5,-3248.5 ccw(c-2259.49,-3213.51) -2210,-3213.51 ccw(c-2160.51,-3213.51) R14.2@-2195.51,-3248.5 ; R14.2@-2210,-3265 DS1.1@-2210,-3160
NetDS1_2: DS1.2 R13.2 | length 285.1
  Bottom Layer w15: DS1.2@-2129.09,-3179.09 cw(c-2175.18,-3225.18) -2110,-3225.18 cw(c-2044.82,-3225.18) DS1.2@-2090.91,-3179.09 ; R13.2@-2124.5,-3248.5 ccw(c-2159.49,-3213.51) -2110,-3213.51 ccw(c-2060.51,-3213.51) R13.2@-2095.51,-3248.5 ; R13.2@-2110,-3265 DS1.2@-2110,-3160
NetDS1_3: DS1.3 DS1.8 T1.2 | length 806.9
  Bottom Layer w15: DS1.3@-2029.09,-3140.91 ccw(c-2075.18,-3094.82) -2010,-3094.82 ccw(c-1944.82,-3094.82) DS1.3@-1990.91,-3140.91 ; DS1.8@-2029.09,-2579.09 cw(c-2075.18,-2625.18) -2010,-2625.18 cw(c-1944.82,-2625.18) DS1.8@-1990.91,-2579.09 ; DS1.3@-2010,-3160 -2010,-3004.52 -2007.4,-3001.92 -2007.4,-2966.52 T1.2@-2007.4,-2959.61 -2007.4,-2758.49 -2010,-2755.89 DS1.8@-2010,-2560
NetDS1_4: DS1.4 R12.2 | length 290.1
  Bottom Layer w15: DS1.4@-1929.09,-3179.09 cw(c-1975.18,-3225.18) -1910,-3225.18 cw(c-1844.82,-3225.18) DS1.4@-1890.91,-3179.09 ; R12.2@-1924.5,-3253.5 ccw(c-1959.49,-3218.51) -1910,-3218.51 ccw(c-1860.51,-3218.51) R12.2@-1895.51,-3253.5 ; R12.2@-1910,-3270 DS1.4@-1910,-3160
NetDS1_5: DS1.5 R18.2 | length 290.1
  Bottom Layer w15: DS1.5@-1829.09,-3179.09 cw(c-1875.18,-3225.18) -1810,-3225.18 cw(c-1744.82,-3225.18) DS1.5@-1790.91,-3179.09 ; R18.2@-1824.5,-3253.5 ccw(c-1859.49,-3218.51) -1810,-3218.51 ccw(c-1760.51,-3218.51) R18.2@-1795.51,-3253.5 ; R18.2@-1810,-3270 DS1.5@-1810,-3160
NetDS1_6: DS1.6 R10.2 | length 285.1
  Bottom Layer w15: DS1.6@-1829.09,-2579.09 cw(c-1875.18,-2625.18) -1810,-2625.18 cw(c-1744.82,-2625.18) DS1.6@-1790.91,-2579.09 ; R10.2@-1824.5,-2648.5 ccw(c-1859.49,-2613.51) -1810,-2613.51 ccw(c-1760.51,-2613.51) R10.2@-1795.51,-2648.5 ; R10.2@-1810,-2665 DS1.6@-1810,-2560
NetDS1_7: DS1.7 R8.2 | length 285.1
  Bottom Layer w15: DS1.7@-1929.09,-2579.09 cw(c-1975.18,-2625.18) -1910,-2625.18 cw(c-1844.82,-2625.18) DS1.7@-1890.91,-2579.09 ; R8.2@-1924.5,-2648.5 ccw(c-1959.49,-2613.51) -1910,-2613.51 ccw(c-1860.51,-2613.51) R8.2@-1895.51,-2648.5 ; R8.2@-1910,-2665 DS1.7@-1910,-2560
NetDS1_9: DS1.9 R16.2 | length 285.1
  Bottom Layer w15: DS1.9@-2129.09,-2579.09 cw(c-2175.18,-2625.18) -2110,-2625.18 cw(c-2044.82,-2625.18) DS1.9@-2090.91,-2579.09 ; R16.2@-2124.5,-2648.5 ccw(c-2159.49,-2613.51) -2110,-2613.51 ccw(c-2060.51,-2613.51) R16.2@-2095.51,-2648.5 ; R16.2@-2110,-2665 DS1.9@-2110,-2560
NetDS1_10: DS1.10 R17.2 | length 285.1
  Bottom Layer w15: DS1.10@-2229.09,-2579.09 cw(c-2275.18,-2625.18) -2210,-2625.18 cw(c-2144.82,-2625.18) DS1.10@-2190.91,-2579.09 ; R17.2@-2224.5,-2648.5 ccw(c-2259.49,-2613.51) -2210,-2613.51 ccw(c-2160.51,-2613.51) R17.2@-2195.51,-2648.5 ; R17.2@-2210,-2665 DS1.10@-2210,-2560
NetJ3_2: J3.2 U2.9 | length 970.9
  Top Layer w15: v1@-1652.37,-2927.37 cw(c-1682.25,-2957.25) -1640,-2957.25 cw(c-1597.75,-2957.25) v1@-1627.63,-2927.37 ; v1(-1640,-2915) -1640,-3020 -1565,-3095 J3.2@-1565,-3550 ; J3.2@-1580.58,-3534.42 ccw(c-1618.18,-3496.82) -1565,-3496.82 ccw(c-1511.82,-3496.82) J3.2@-1549.43,-3534.42
  Bottom Layer w15: v1(-1640,-2915) -1605,-2915 ; v1@-1626,-2925.5 cw(c-1605,-2941.25) -1605,-2915 ; v1@-1626,-2904.5 ccw(c-1605,-2888.75) -1605,-2915 ; U2.9@-1542,-2895 -1585,-2895 -1605,-2915
NetR8_1: R8.1 U2.3 | length 1449.1
  Top Layer w15: v1@-1977.01,-2900.15 ccw(c-2006.88,-2870.27) -1964.63,-2870.27 ccw(c-1922.39,-2870.27) v1@-1952.26,-2900.15 ; v1(-1964.63,-2912.52) -1964.63,-2799.63 -1914.52,-2749.52 v1@-1250,-2749.52 ; -1293.4,-2749.52 cw(c-1293.4,-2793.4) v1@-1262.37,-2762.37 ; -1291.1,-2749.52 ccw(c-1291.1,-2708.9) v1@-1262.37,-2737.63
  Bottom Layer w15: v1@-1975.98,-2899.2 ccw(c-1996.9,-2874.64) -1964.63,-2874.64 ; v1(-1964.63,-2912.52) -1964.63,-2874.63 ; v1@-1953.29,-2899.2 cw(c-1932.37,-2874.64) -1964.63,-2874.64 ; R8.1@-1924.5,-2771.49 cw(c-1959.49,-2806.49) -1910,-2806.49 cw(c-1860.51,-2806.49) R8.1@-1895.51,-2771.49 ; R8.1@-1910,-2755 -1910,-2820 -1964.63,-2874.63 ; U2.3@-1338,-2745 v1@-1250,-2745 ; -1304.32,-2745 cw(c-1304.32,-2804.32) v1@-1262.37,-2762.37 ; -1280.18,-2745 ccw(c-1280.18,-2719.82) v1@-1262.37,-2737.63
  other v1: -1250,-2750
NetR10_1: R10.1 U2.4 | length 942.3
  Bottom Layer w15: R10.1@-1824.5,-2771.49 cw(c-1859.49,-2806.49) -1810,-2806.49 cw(c-1760.51,-2806.49) R10.1@-1795.51,-2771.49 ; R10.1@-1810,-2755 -1810,-2964.16 -1772.63,-3001.52 -1736.63,-3001.52 -1726.63,-3011.52 -1526.63,-3011.52 -1486.63,-2971.52 -1486.63,-2845.03 -1436.6,-2795 U2.4@-1338,-2795
NetR11_2: R11.2 T2.1 | length 187.7
  Bottom Layer w15: T2.1@-2795,-2620 R11.2@-2685,-2620 ; R11.2@-2701.5,-2634.49 ccw(c-2736.49,-2669.49) -2736.49,-2620 ccw(c-2736.49,-2570.51) R11.2@-2701.5,-2605.5
NetR12_1: R12.1 U2.5 | length 1474.4
  Top Layer w15: v1(-2010,-3360) v1(-1655,-3360) ; v1@-1997.63,-3372.37 cw(c-1967.75,-3402.25) -1967.75,-3360 cw(c-1967.75,-3317.75) v1@-1997.63,-3347.63 ; v1@-1667.37,-3372.37 ccw(c-1697.25,-3402.25) -1697.25,-3360 ccw(c-1697.25,-3317.75) v1@-1667.37,-3347.63
  Bottom Layer w15: v1(-2010,-3360) R12.1@-1910,-3360 ; v1@-1997.63,-3372.37 cw(c-1967.75,-3402.25) -1967.75,-3360 cw(c-1967.75,-3317.75) v1@-1997.63,-3347.63 ; R12.1@-1924.5,-3374.49 ccw(c-1959.49,-3409.49) -1959.49,-3360 ccw(c-1959.49,-3310.51) R12.1@-1924.5,-3345.5 ; v1(-1655,-3360) -1460.13,-3165.13 -1460.13,-2916.02 -1389.11,-2845 U2.5@-1338,-2845 ; v1@-1655,-3342.5 ccw(c-1655,-3300.25) -1625.13,-3330.13 ccw(c-1595.25,-3360) v1@-1637.5,-3360
NetR13_1: R13.1 U2.6 | length 1291.1
  Bottom Layer w15: R13.1@-2124.5,-3371.49 cw(c-2159.49,-3406.49) -2110,-3406.49 cw(c-2060.51,-3406.49) R13.1@-2095.51,-3371.49 ; R13.1@-2110,-3355 -2110,-3410 -2087.5,-3432.5 -1654.61,-3432.5 -1415,-3192.89 -1415,-2929.36 -1380.63,-2895 U2.6@-1338,-2895
NetR14_1: R14.1 U2.10 | length 1598
  Top Layer w15: v1(-2282.63,-3275.52) -1741.07,-3275.52 -1680,-3214.45 -1680,-2935.1 -1682.5,-2932.6 -1682.5,-2852.5 -1675,-2845 ; v1@-2270.26,-3287.9 cw(c-2240.39,-3317.77) -2240.39,-3275.52 cw(c-2240.39,-3233.27) v1@-2270.26,-3263.15 ; v1@-1654,-2855.5 ccw(c-1675,-2871.25) -1675,-2845 ; v1@-1654,-2834.5 cw(c-1675,-2818.75) -1675,-2845 ; v1@-1639.63,-2845 -1675,-2845
  Bottom Layer w15: v1@-2295.01,-3287.9 cw(c-2324.88,-3317.77) -2282.63,-3317.77 cw(c-2240.39,-3317.77) v1@-2270.26,-3287.9 ; v1(-2282.63,-3275.52) -2282.63,-3331.52 -2259.16,-3355 ; R14.1@-2224.57,-3369.42 ccw(c-2259.16,-3403.68) -2259.16,-3355 ; R14.1@-2224.57,-3340.57 cw(c-2259.16,-3306.32) -2259.16,-3355 ; R14.1@-2210,-3355 -2259.16,-3355 ; v1(-1640,-2845) U2.10@-1542,-2845 ; v1@-1627.63,-2857.37 cw(c-1597.75,-2887.25) -1597.75,-2845 cw(c-1597.75,-2802.75) v1@-1627.63,-2832.63
NetR15_2: R15.2 T1.1 | length 138.1
  Bottom Layer w15: T1.1@-1970,-3060 -1930.63,-3060 -1925.63,-3055 ; R15.2@-1903.98,-3066.49 ccw(c-1925.63,-3081.15) -1925.63,-3055 ; R15.2@-1903.98,-3043.51 cw(c-1925.63,-3028.85) -1925.63,-3055 ; R15.2@-1885,-3055 -1925.63,-3055
NetR16_1: R16.1 U2.11 | length 1032
  Top Layer w15: v1(-2100,-2850) -2040,-2850 -2005,-2815 -2005,-2745 -1945,-2685 v1(-1705,-2685)
  Bottom Layer w15: R16.1@-2124.18,-2771.81 cw(c-2155.94,-2805) -2110,-2805 cw(c-2064.06,-2805) R16.1@-2095.83,-2771.81 ; v1@-2110.5,-2836 ccw(c-2126.25,-2815) -2100,-2815 ; R16.1@-2110,-2755 -2110,-2805 -2100,-2815 ; v1(-2100,-2850) -2100,-2815 ; v1@-2089.5,-2836 cw(c-2073.75,-2815) -2100,-2815 ; v1@-1717.37,-2697.37 cw(c-1747.25,-2727.25) -1705,-2727.25 cw(c-1662.75,-2727.25) v1@-1692.63,-2697.37 ; v1(-1705,-2685) -1705,-2737.5 -1647.5,-2795 U2.11@-1542,-2795
NetR17_1: R17.1 U2.12 | length 1354.9
  Bottom Layer w15: R17.1@-2224.5,-2769.49 ccw(c-2259.49,-2804.49) -2259.49,-2755 ccw(c-2259.49,-2705.51) R17.1@-2224.5,-2740.5 ; R17.1@-2210,-2755 -2280,-2755 -2330,-2705 -2330,-2555 -2262.97,-2487.97 -1737.97,-2487.97 -1630.63,-2595.31 -1630.63,-2705 -1590.63,-2745 U2.12@-1542,-2745
NetR18_1: R18.1 U2.13 | length 1726
  Top Layer w15: v1(-1502.63,-3075.52) -1360.52,-3075.52 -1205,-2920 -1205,-2684.73 -1294.73,-2595 v1(-1440,-2595)
  Bottom Layer w15: R18.1@-1810,-3360 -1735,-3360 -1502.63,-3127.63 v1(-1502.63,-3075.52) ; R18.1@-1795.51,-3374.49 cw(c-1760.51,-3409.49) -1760.51,-3360 cw(c-1760.51,-3310.51) R18.1@-1795.51,-3345.5 ; U2.13@-1542,-2695 -1460,-2695 -1440,-2675 v1(-1440,-2595) ; v1@-1515.01,-3087.9 cw(c-1544.88,-3117.77) -1502.63,-3117.77 cw(c-1460.39,-3117.77) v1@-1490.26,-3087.9 ; v1@-1452.37,-2607.37 cw(c-1482.25,-2637.25) -1440,-2637.25 cw(c-1397.75,-2637.25) v1@-1427.63,-2607.37
ON/OFF: R1.1 S1.2 U1.15 | length 5479.7
  Bottom Layer w15: U1.15@-2972.2,-3493.27 -2972.2,-3611.52 -2985.2,-3624.52 -3410.48,-3624.52 -3495,-3540 -3495,-3196.89 -3349.63,-3051.52 -3290.63,-3051.52 -3235,-2995.89 -3235,-2591.89 -2875.63,-2232.53 -690.63,-2232.53 -658.63,-2264.52 -658.63,-2451.52 -733.63,-2526.52 R1.1@-920.63,-2526.52 ; R1.1@-935.13,-2541.02 cw(c-970.13,-2576.01) -920.63,-2576.01 cw(c-871.14,-2576.01) R1.1@-906.14,-2541.02 ; R1.1@-935.13,-2512.03 ccw(c-970.13,-2477.03) -920.63,-2477.03 ccw(c-871.14,-2477.03) R1.1@-906.14,-2512.03 ; S1.2@-920.32,-2648.1 -920.32,-2587.52 -920.63,-2587.21 R1.1@-920.63,-2526.52 ; S1.2@-920.32,-2392.19 -920.32,-2459.21 -920.63,-2459.52 R1.1@-920.63,-2526.52 ; R1.1@-904.14,-2541.02 cw(c-869.14,-2576.01) -869.14,-2526.52 cw(c-869.14,-2477.03) R1.1@-904.14,-2512.03